# Altium PCB PreTriggerECAL_v3.PcbDoc (part 3 of 3)
Units mm, origin at the board's own origin, x right, y up, seen from the top; angles counter-clockwise.
Board outline 200 x 130 mm, 8 copper layers (Top Layer, Internal Plane 1, Mid-Layer 1, Mid-Layer 2, Mid-Layer 3, Mid-Layer 4, Mid-Layer 5, Bottom Layer), stack 1.695 mm thick; 121 components, 209 nets, 2107 pads, 421 vias.
Unrouted connection lines stored in the file: 26.
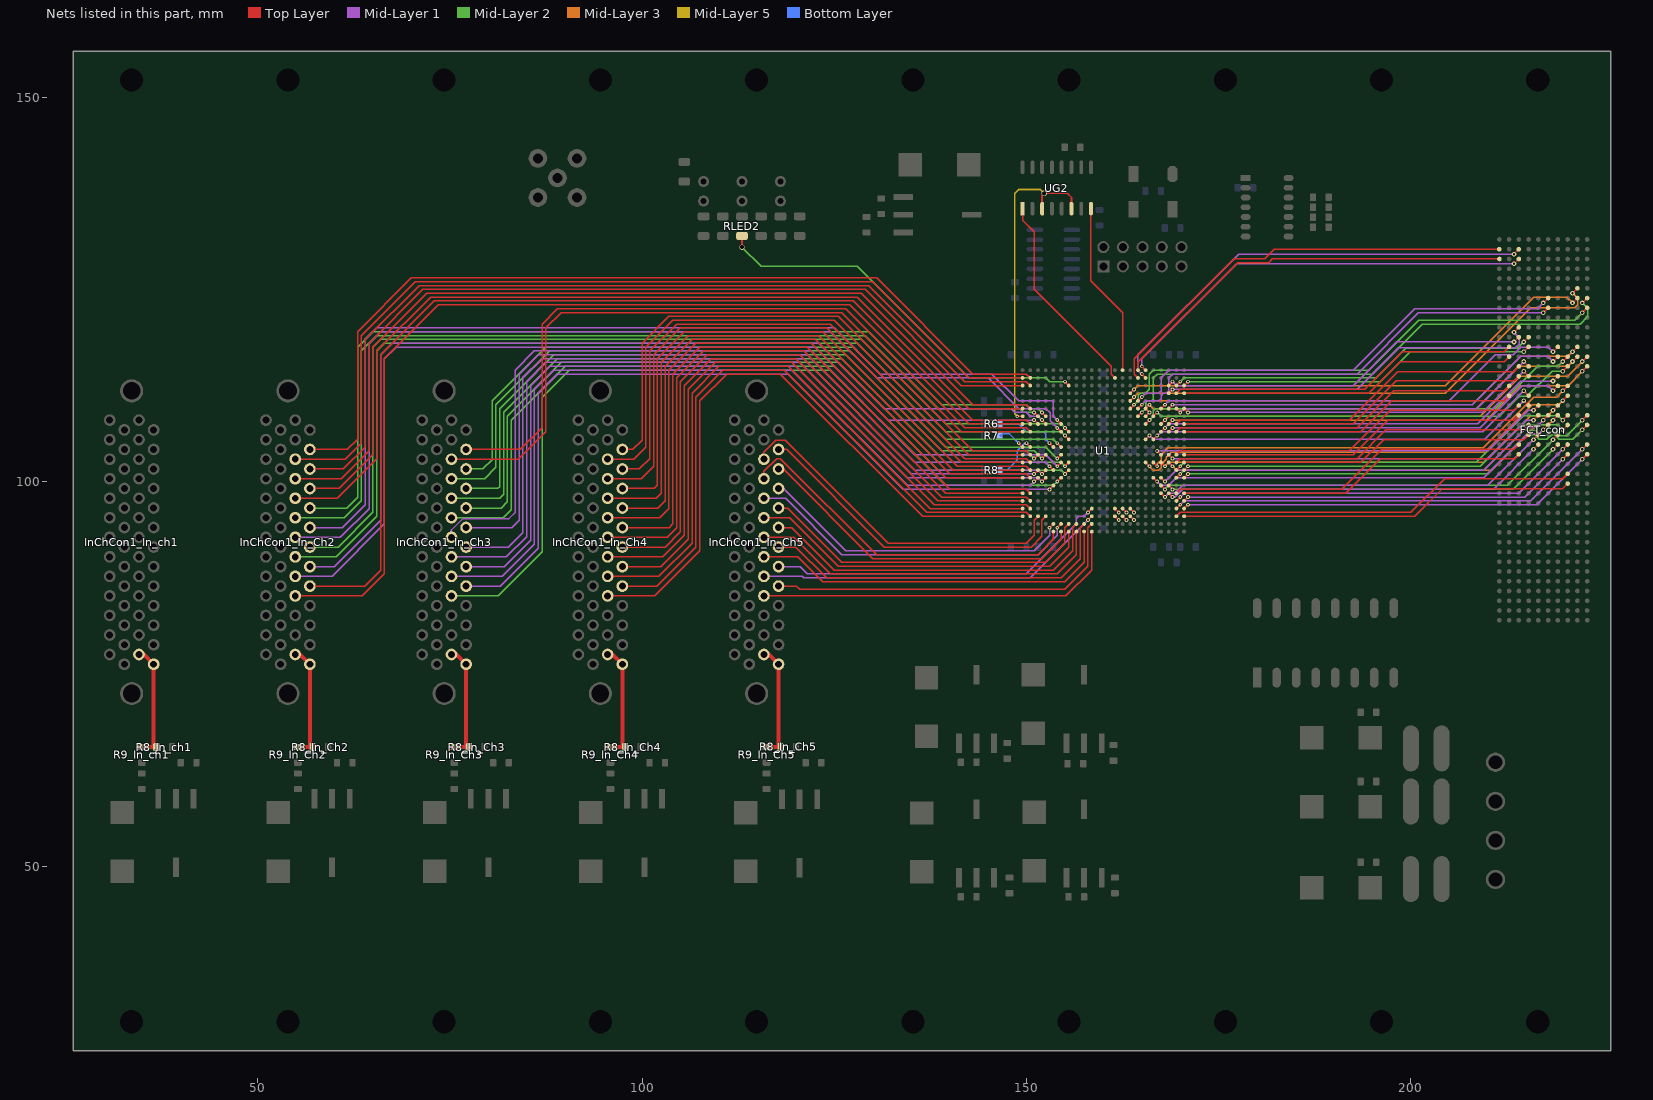
[diagram p9: the nets of this part, all layers, seen from the top]

## Via types
v1: diameter 0.5, hole 0.25, Top Layer to Bottom Layer, tented top, 267 vias
v2: diameter 0.6, hole 0.3, Top Layer to Bottom Layer, 60 vias
v3: diameter 1.3, hole 0.7, Top Layer to Bottom Layer, 50 vias
v4: diameter 0.7, hole 0.5, Top Layer to Bottom Layer, tented top, 30 vias
v5: diameter 0.5, hole 0.3, Top Layer to Bottom Layer, 4 vias
v6: diameter 2, hole 1.27, Top Layer to Bottom Layer, 2 vias
v7: diameter 0.7, hole 0.5, Top Layer to Bottom Layer, 2 vias
v8: diameter 0.7, hole 0.4, Top Layer to Bottom Layer, 2 vias
v9: diameter 1.27, hole 0.711, Top Layer to Bottom Layer, 2 vias
v10: diameter 3, hole 3, Top Layer to Bottom Layer, tented top, 2 vias

## Nets (pads, with @x,y where several pads share a name; then routed paths per layer and width w, separated by ;. In a path a pad name is that pad's centre, name@x,y a point inside that pad or via, vN(x,y) a via of type N, cw(c..) or ccw(c..) an arc to the next point about the centre after c; other vN are vias at no path point) (continued)
PART2_DIGCH1_N: InChCon1_In_Ch2.A5 U1.B1 | length 117.5
  Top Layer w0.175: InChCon1_In_Ch2.A5@54.892,102.92 61.42,102.92 63.5,105 63.5,119 70.5,126 130,126 142.5,113.5 U1.B1@149.5,113.5
PART2_DIGCH1_P: InChCon1_In_Ch2.A4 U1.B2 | length 116.5
  Top Layer w0.175: InChCon1_In_Ch2.A4@56.797,104.19 61.69,104.19 63,105.5 63,119.5 70,126.5 130.5,126.5 143,114 150,114 U1.B2@150.5,113.5
PART2_DIGCH2_N: InChCon1_In_Ch2.A7 U1.C1 | length 118.2
  Top Layer w0.175: InChCon1_In_Ch2.A7@54.892,100.38 60.88,100.38 64.5,104 64.5,118 71.5,125 129,125 141.5,112.5 U1.C1@149.5,112.5
PART2_DIGCH2_P: InChCon1_In_Ch2.A6 U1.C2 | length 117.2
  Top Layer w0.175: InChCon1_In_Ch2.A6@56.797,101.65 61.15,101.65 64,104.5 64,118.5 71,125.5 129.5,125.5 142,113 150,113 U1.C2@150.5,112.5
PART2_DIGCH3_N: InChCon1_In_Ch2.A9 U1.F1 | length 119.7
  Top Layer w0.175: InChCon1_In_Ch2.A9@54.892,97.84 60.34,97.84 65.5,103 65.5,117 72.5,124 128,124 142.5,109.5 U1.F1@149.5,109.5
PART2_DIGCH3_P: InChCon1_In_Ch2.A8 U1.F2 | length 118.6
  Top Layer w0.175: InChCon1_In_Ch2.A8@56.797,99.11 60.61,99.11 65,103.5 65,117.5 72,124.5 128.5,124.5 143,110 150,110 U1.F2@150.5,109.5
PART2_DIGCH4_N: InChCon1_In_Ch2.A11 U1.G3 | length 122.2
  Top Layer w0.175: v1(151,109) U1.G3@151.5,108.5
  Mid-Layer 2 w0.175: InChCon1_In_Ch2.A11@54.892,95.3 61.3,95.3 63.5,97.5 63.5,117 65.5,119 129,119 138.5,109.5 149.1,109.5 149.6,109 v1(151,109)
PART2_DIGCH4_P: InChCon1_In_Ch2.A10 U1.G4 | length 121.2
  Top Layer w0.175: v1(152,109) U1.G4@152.5,108.5
  Mid-Layer 2 w0.175: InChCon1_In_Ch2.A10@56.797,96.57 61.57,96.57 63,98 63,117.5 65,119.5 129.5,119.5 139,110 150,110 150.5,109.5 151.5,109.5 v1(152,109)
PART2_DIGCH5_N: InChCon1_In_Ch2.A13 U1.J6 | length 129.2
  Top Layer w0.175: v1(154,107) U1.J6@154.5,106.5
  Mid-Layer 1 w0.175: InChCon1_In_Ch2.A13@54.892,92.76 60.76,92.76 64.5,96.5 64.5,118 66,119.5 124.5,119.5 130.5,113.5 145,113.5 149,109.5 152.5,109.5 153.071,108.929 153.071,107.929 v1(154,107)
PART2_DIGCH5_P: InChCon1_In_Ch2.A12 U1.H6 | length 127.4
  Top Layer w0.175: v1(154,108) U1.H6@154.5,107.5
  Mid-Layer 1 w0.175: InChCon1_In_Ch2.A12@56.797,94.03 61.03,94.03 64,97 64,118.5 65.5,120 125,120 131,114 145.5,114 149,110.5 153.5,110.5 153.5,108.5 v1(154,108)
PART2_DIGCH6_N: InChCon1_In_Ch2.A15 U1.K7 | length 129.9
  Top Layer w0.175: v1(155,106) U1.K7@155.5,105.5
  Mid-Layer 2 w0.175: InChCon1_In_Ch2.A15@54.892,90.22 60.22,90.22 65.5,95.5 65.5,117 66.5,118 128,118 139.5,106.5 154.5,106.5 v1(155,106)
PART2_DIGCH6_P: InChCon1_In_Ch2.A14 U1.J7 | length 127.5
  Top Layer w0.175: v1(155,107) U1.J7@155.5,106.5
  Mid-Layer 2 w0.175: InChCon1_In_Ch2.A14@56.797,91.49 60.49,91.49 65,96 65,117.5 66,118.5 128.5,118.5 139.5,107.5 154.5,107.5 v1(155,107)
PART2_DIGCH7_N: InChCon1_In_Ch2.A17 U1.H3 | length 125.7
  Top Layer w0.175: v1(151,108) U1.H3@151.5,107.5
  Mid-Layer 1 w0.175: InChCon1_In_Ch2.A17@54.852,87.68 InChCon1_In_Ch2.A17@54.892,87.68 59.68,87.68 66.5,94.5 66.5,116 68,117.5 122.5,117.5 132,108 v1(151,108)
PART2_DIGCH7_P: InChCon1_In_Ch2.A16 U1.H4 | length 124.7
  Top Layer w0.175: v1(152,108) U1.H4@152.5,107.5
  Mid-Layer 1 w0.175: InChCon1_In_Ch2.A16@56.797,88.95 59.95,88.95 66,95 66,116.5 67.5,118 123,118 131.5,109.5 148,109.5 148.5,109 150,109 150.5,108.5 151.5,108.5 v1(152,108)
PART2_DIGCH8_N: InChCon1_In_Ch2.A19 U1.H1 | length 133.1
  Top Layer w0.175: InChCon1_In_Ch2.A19@54.892,85.14 63.64,85.14 66.5,88 66.5,116 73.5,123 127,123 142.5,107.5 U1.H1@149.5,107.5
PART2_DIGCH8_P: InChCon1_In_Ch2.A18 U1.H2 | length 132.1
  Top Layer w0.175: InChCon1_In_Ch2.A18@56.797,86.41 63.91,86.41 66,88.5 66,116.5 73,123.5 127.5,123.5 143,108 150,108 U1.H2@150.5,107.5
PART3_DIGCH1_N: InChCon1_In_Ch3.A5 U1.J1 | length 96.5
  Top Layer w0.175: InChCon1_In_Ch3.A5@75.212,102.92 83.92,102.92 87.5,106.5 87.5,120 89.5,122 126,122 141.5,106.5 U1.J1@149.5,106.5
PART3_DIGCH1_P: InChCon1_In_Ch3.A4 U1.J2 | length 95.5
  Top Layer w0.175: InChCon1_In_Ch3.A4@77.117,104.19 84.19,104.19 87,107 87,120.5 89,122.5 126.5,122.5 142,107 150,107 U1.J2@150.5,106.5
PART3_DIGCH2_N: InChCon1_In_Ch3.A7 U1.M6 | length 96.9
  Top Layer w0.175: v1(154,103) U1.M6@154.5,103.5
  Mid-Layer 2 w0.175: InChCon1_In_Ch3.A7@75.212,100.38 79.52,100.38 81,101.86 81,110 88,117 127,117 139.5,104.5 152.5,104.5 v1(154,103)
PART3_DIGCH2_P: InChCon1_In_Ch3.A6 U1.L6 | length 93.8
  Top Layer w0.175: v1(154,105) U1.L6@154.5,104.5
  Mid-Layer 2 w0.175: InChCon1_In_Ch3.A6@77.117,101.65 79.29,101.65 80.5,102.86 80.5,110.5 87.5,117.5 127.5,117.5 139.5,105.5 153.5,105.5 v1(154,105)
PART3_DIGCH3_N: InChCon1_In_Ch3.A9 U1.M3 | length 95.6
  Top Layer w0.175: v1(151,103) U1.M3@151.5,103.5
  Mid-Layer 2 w0.175: InChCon1_In_Ch3.A9@75.212,97.84 81.48,97.84 82,98.36 82,109 89,116 126,116 138.5,103.5 150.5,103.5 v1(151,103)
PART3_DIGCH3_P: InChCon1_In_Ch3.A8 U1.M4 | length 94.3
  Top Layer w0.175: v1(152,103) U1.M4@152.5,103.5
  Mid-Layer 2 w0.175: InChCon1_In_Ch3.A8@77.117,99.11 81.25,99.11 81.5,99.36 81.5,109.5 88.5,116.5 126.5,116.5 139,104 151,104 v1(152,103)
PART3_DIGCH4_N: InChCon1_In_Ch3.A11 U1.P7 | length 101.3
  Top Layer w0.175: v1(155,101) U1.P7@155.5,101.5
  Mid-Layer 2 w0.175: InChCon1_In_Ch3.A11@75.212,95.3 81.94,95.3 83,96.36 83,108 90,115 125,115 138.5,101.5 154.5,101.5 v1(155,101)
PART3_DIGCH4_P: InChCon1_In_Ch3.A10 U1.N7 | length 98.5
  Top Layer w0.175: v1(155,102) U1.N7@155.5,102.5
  Mid-Layer 2 w0.175: InChCon1_In_Ch3.A10@77.117,96.57 81.71,96.57 82.5,97.36 82.5,108.5 89.5,115.5 125.5,115.5 138.5,102.5 154.5,102.5 v1(155,102)
PART3_DIGCH5_N: InChCon1_In_Ch3.A13 U1.N6 | length 107.1
  Top Layer w0.175: v1(154,102) U1.N6@154.5,102.5
  Mid-Layer 1 w0.175: 83.5,96 83.5,114.5 86,117 122,117 135.5,103.5 152.5,103.5 v1(154,102)
  Mid-Layer 1 w0.2: InChCon1_In_Ch3.A13@75.212,92.76 75.212,93.712 76.7,95.2 82.7,95.2 83.5,96
PART3_DIGCH5_P: InChCon1_In_Ch3.A12 U1.P5 | length 103
  Top Layer w0.175: v1(153,102) U1.P5@153.5,101.5
  Mid-Layer 1 w0.175: InChCon1_In_Ch3.A12@77.117,94.03 83.03,94.03 84,95 84,114 86.5,116.5 121.5,116.5 135.5,102.5 152.5,102.5 v1(153,102)
PART3_DIGCH6_N: InChCon1_In_Ch3.A15 U1.P3 | length 104.8
  Top Layer w0.175: v1(151,101) U1.P3@151.5,101.5
  Mid-Layer 1 w0.175: InChCon1_In_Ch3.A15@75.212,90.22 82.36,90.22 85,92.86 85,113 87.5,115.5 120.5,115.5 135,101 v1(151,101)
PART3_DIGCH6_P: InChCon1_In_Ch3.A14 U1.P4 | length 103.8
  Top Layer w0.175: v1(152,101) U1.P4@152.5,101.5
  Mid-Layer 1 w0.175: InChCon1_In_Ch3.A14@77.117,91.49 82.63,91.49 84.5,93.36 84.5,113.5 87,116 121,116 135.5,101.5 151.5,101.5 v1(152,101)
PART3_DIGCH7_N: InChCon1_In_Ch3.A17 U1.R3 | length 105.9
  Top Layer w0.175: v1(151,100) U1.R3@151.5,100.5
  Mid-Layer 1 w0.175: InChCon1_In_Ch3.A17@75.172,87.68 InChCon1_In_Ch3.A17@75.212,87.68 81.82,87.68 86,91.86 86,112 88.5,114.5 119.5,114.5 134.5,99.5 150.5,99.5 v1(151,100)
PART3_DIGCH7_P: InChCon1_In_Ch3.A16 U1.R4 | length 104.4
  Top Layer w0.175: v1(152,100) U1.R4@152.5,100.5
  Mid-Layer 1 w0.175: InChCon1_In_Ch3.A16@77.117,88.95 82.09,88.95 85.5,92.36 85.5,112.5 88,115 120,115 134.5,100.5 151.5,100.5 v1(152,100)
PART3_DIGCH8_N: InChCon1_In_Ch3.A19 U1.R6 | length 109.9
  Top Layer w0.175: v1(154,100) U1.R6@154.5,100.5
  Mid-Layer 2 w0.175: InChCon1_In_Ch3.A19@75.212,85.14 81.28,85.14 87,90.86 87,111 90.5,114.5 124.5,114.5 139.5,99.5 153.5,99.5 v1(154,100)
PART3_DIGCH8_P: InChCon1_In_Ch3.A18 U1.T5 | length 106
  Top Layer w0.175: v1(153,99) U1.T5@153.5,99.5
  Mid-Layer 1 w0.175: InChCon1_In_Ch3.A18@77.117,86.41 81.55,86.41 86.5,91.36 86.5,111.5 89,114 119,114 134,99 v1(153,99)
PART4_DIGCH1_N: InChCon1_In_Ch4.A5 U1.M1 | length 76.3
  Top Layer w0.175: InChCon1_In_Ch4.A5@95.532,102.92 98.92,102.92 100.5,104.5 100.5,117.5 104,121 125,121 142.5,103.5 U1.M1@149.5,103.5
PART4_DIGCH1_P: InChCon1_In_Ch4.A4 U1.M2 | length 75.1
  Top Layer w0.175: InChCon1_In_Ch4.A4@97.437,104.19 98.79,104.19 100,105.4 100,118 103.5,121.5 125.5,121.5 143,104 150,104 U1.M2@150.5,103.5
PART4_DIGCH2_N: InChCon1_In_Ch4.A7 U1.N1 | length 77.8
  Top Layer w0.175: InChCon1_In_Ch4.A7@95.532,100.38 99.88,100.38 101.5,102 101.5,116.5 105,120 124,120 141.5,102.5 U1.N1@149.5,102.5
PART4_DIGCH2_P: InChCon1_In_Ch4.A6 U1.N2 | length 76.5
  Top Layer w0.175: InChCon1_In_Ch4.A6@97.437,101.65 99.65,101.65 101,103 101,117 104.5,120.5 124.5,120.5 142,103 150,103 U1.N2@150.5,102.5
PART4_DIGCH3_N: InChCon1_In_Ch4.A9 U1.P1 | length 79.9
  Top Layer w0.175: InChCon1_In_Ch4.A9@95.532,97.84 101.84,97.84 102.5,98.5 102.5,115.5 106,119 123,119 140.5,101.5 U1.P1@149.5,101.5
PART4_DIGCH3_P: InChCon1_In_Ch4.A8 U1.P2 | length 78.6
  Top Layer w0.175: InChCon1_In_Ch4.A8@97.437,99.11 101.61,99.11 102,99.5 102,116 105.5,119.5 123.5,119.5 141,102 150,102 U1.P2@150.5,101.5
PART4_DIGCH4_N: InChCon1_In_Ch4.A11 U1.R1 | length 81.2
  Top Layer w0.175: InChCon1_In_Ch4.A11@95.532,95.3 102.3,95.3 103.5,96.5 103.5,114.5 107,118 122,118 139.5,100.5 U1.R1@149.5,100.5
PART4_DIGCH4_P: InChCon1_In_Ch4.A10 U1.R2 | length 79.9
  Top Layer w0.175: InChCon1_In_Ch4.A10@97.437,96.57 102.07,96.57 103,97.5 103,115 106.5,118.5 122.5,118.5 140,101 150,101 U1.R2@150.5,100.5
PART4_DIGCH5_N: InChCon1_In_Ch4.A13 U1.U1 | length 83.1
  Top Layer w0.175: InChCon1_In_Ch4.A13@95.532,92.76 103.26,92.76 104.5,94 104.5,113.5 108,117 121,117 139.5,98.5 U1.U1@149.5,98.5
PART4_DIGCH5_P: InChCon1_In_Ch4.A12 U1.U2 | length 82.1
  Top Layer w0.175: InChCon1_In_Ch4.A12@97.437,94.03 103.53,94.03 104,94.5 104,114 107.5,117.5 121.5,117.5 140,99 150,99 U1.U2@150.5,98.5
PART4_DIGCH6_N: InChCon1_In_Ch4.A15 U1.V1 | length 83.7
  Top Layer w0.175: InChCon1_In_Ch4.A15@95.532,90.22 102.72,90.22 105.5,93 105.5,112.5 109,116 119.993,116 138.493,97.5 U1.V1@149.5,97.5
PART4_DIGCH6_P: InChCon1_In_Ch4.A14 U1.V2 | length 82.7
  Top Layer w0.175: InChCon1_In_Ch4.A14@97.437,91.49 102.99,91.49 105,93.5 105,113 108.5,116.5 120.5,116.5 139,98 150,98 U1.V2@150.5,97.5
PART4_DIGCH7_N: InChCon1_In_Ch4.A17 U1.W1 | length 84.4
  Top Layer w0.175: InChCon1_In_Ch4.A17@95.532,87.68 102.18,87.68 106.5,92 106.5,111.5 110,115 119,115 137.5,96.5 U1.W1@149.5,96.5
PART4_DIGCH7_P: InChCon1_In_Ch4.A16 U1.W2 | length 83.4
  Top Layer w0.175: InChCon1_In_Ch4.A16@97.437,88.95 102.45,88.95 106,92.5 106,112 109.5,115.5 119.5,115.5 138,97 150,97 U1.W2@150.5,96.5
PART4_DIGCH8_N: InChCon1_In_Ch4.A19 U1.Y1 | length 85
  Top Layer w0.175: InChCon1_In_Ch4.A19@95.532,85.14 101.64,85.14 107.5,91 107.5,110.5 111,114 118,114 136.5,95.5 U1.Y1@149.5,95.5
PART4_DIGCH8_P: InChCon1_In_Ch4.A18 U1.Y2 | length 84
  Top Layer w0.175: InChCon1_In_Ch4.A18@97.437,86.41 101.91,86.41 107,91.5 107,111 110.5,114.5 118.5,114.5 137,96 150,96 U1.Y2@150.5,95.5
PART5_DIGCH1_N: InChCon1_In_Ch5.A5 U1.Y3 | length 45.4
  Top Layer w0.175: InChCon1_In_Ch5.A5@115.852,102.92 115.852,103.852 117.4,105.4 118.6,105.4 132,92 150,92 151,93 151,95 U1.Y3@151.5,95.5
PART5_DIGCH1_P: InChCon1_In_Ch5.A4 U1.Y4 | length 42.9
  Top Layer w0.175: InChCon1_In_Ch5.A4@117.757,104.19 118.81,104.19 131.5,91.5 150.6,91.5 152,92.9 152,95 U1.Y4@152.5,95.5
PART5_DIGCH2_N: InChCon1_In_Ch5.A7 U1.AB5 | length 46.3
  Top Layer w0.175: InChCon1_In_Ch5.A7@115.852,100.38 115.852,101.352 117.5,103 118,103 130.5,90.5 151.5,90.5 153.5,92.5 U1.AB5@153.5,93.5
PART5_DIGCH2_P: InChCon1_In_Ch5.A6 U1.AB6 | length 43.6
  Top Layer w0.175: InChCon1_In_Ch5.A6@117.757,101.65 118.35,101.65 130,90 152,90 154.5,92.5 U1.AB6@154.5,93.5
PART5_DIGCH3_N: InChCon1_In_Ch5.A9 U1.AA6 | length 43.9
  Top Layer w0.175: v1(154,94) U1.AA6@154.5,94.5
  Mid-Layer 1 w0.175: InChCon1_In_Ch5.A9@115.852,97.84 118.66,97.84 126,90.5 151.5,90.5 154,93 v1(154,94)
PART5_DIGCH3_P: InChCon1_In_Ch5.A8 U1.AA5 | length 41.1
  Top Layer w0.175: v1(153,94) U1.AA5@153.5,94.5
  Mid-Layer 1 w0.175: InChCon1_In_Ch5.A8@117.757,99.11 118.39,99.11 126.5,91 151,91 153,93 v1(153,94)
PART5_DIGCH4_N: InChCon1_In_Ch5.A11 U1.AB7 | length 45.3
  Top Layer w0.175: InChCon1_In_Ch5.A11@115.852,95.3 119.2,95.3 125.5,89 153,89 155.5,91.5 U1.AB7@155.5,93.5
PART5_DIGCH4_P: InChCon1_In_Ch5.A10 U1.AA7 | length 43.9
  Top Layer w0.175: InChCon1_In_Ch5.A10@117.757,96.57 118.93,96.57 126,89.5 152.5,89.5 155,92 155,94 U1.AA7@155.5,94.5
PART5_DIGCH5_N: InChCon1_In_Ch5.A13 U1.AB8 | length 46.7
  Top Layer w0.175: InChCon1_In_Ch5.A13@115.852,92.76 119.74,92.76 124.5,88 154,88 156.5,90.5 U1.AB8@156.5,93.5
PART5_DIGCH5_P: InChCon1_In_Ch5.A12 U1.AA8 | length 45.3
  Top Layer w0.175: InChCon1_In_Ch5.A12@117.757,94.03 119.47,94.03 125,88.5 153.5,88.5 156,91 156,94 U1.AA8@156.5,94.5
PART5_DIGCH6_N: InChCon1_In_Ch5.A15 U1.AB9 | length 48
  Top Layer w0.175: InChCon1_In_Ch5.A15@115.852,90.22 120.28,90.22 123.5,87 155,87 157.5,89.5 U1.AB9@157.5,93.5
PART5_DIGCH6_P: InChCon1_In_Ch5.A14 U1.AA9 | length 46.6
  Top Layer w0.175: InChCon1_In_Ch5.A14@117.757,91.49 120.01,91.49 124,87.5 154.5,87.5 157,90 157,94 U1.AA9@157.5,94.5
PART5_DIGCH7_N: InChCon1_In_Ch5.A17 U1.Y10 | length 46
  Top Layer w0.175: v1(158,95) U1.Y10@158.5,95.5
  Mid-Layer 1 w0.175: InChCon1_In_Ch5.A17@115.852,87.68 120.82,87.68 121,87.5 150.5,87.5 v1(158,95)
PART5_DIGCH7_P: InChCon1_In_Ch5.A16 U1.W10 | length 45.1
  Top Layer w0.175: v1(158,96) U1.W10@158.5,96.5
  Mid-Layer 1 w0.175: InChCon1_In_Ch5.A16@117.757,88.95 120.55,88.95 121.5,88 150,88 156.5,94.5 156.5,95.2 156.8,95.5 157.5,95.5 v1(158,96)
PART5_DIGCH8_N: InChCon1_In_Ch5.A19 U1.AB10 | length 49
  Top Layer w0.175: InChCon1_In_Ch5.A19@115.852,85.14 155.14,85.14 158.5,88.5 U1.AB10@158.5,93.5
PART5_DIGCH8_P: InChCon1_In_Ch5.A18 U1.AA10 | length 47.4
  Top Layer w0.175: 155,86 158,89 158,94 U1.AA10@158.5,94.5
  Top Layer w0.2: InChCon1_In_Ch5.A18@117.757,86.41 120.09,86.41 120.5,86 155,86
PLL_CLK: U1.G1 UG2.3 UG2.6 | length 41.4
  Top Layer w0.175: v1(148.8,108.5) U1.G1@149.5,108.5
  Top Layer w0.2: 152.04,137.24 v7(152.3,137.5) 155.3,137.5 155.85,136.95
  Top Layer w0.254: UG2.3@152.04,135.5 152.04,137.24 ; UG2.6@155.85,135.5 155.85,136.95
  Mid-Layer 5 w0.2: v1(148.8,108.5) 148.473,108.827 148.473,137.473 149,138 151.8,138 v7(152.3,137.5)
"PRE BEAM TIME_N": FCT_con.B13 U1.D22 | length 44.2
  Top Layer w0.175: U1.D22@170.5,111.5 172,111.5 194.5,111.5 198.6,115.6 212.11,115.6 FCT_con.B13@212.77,116.26
"PRE BEAM TIME_P": FCT_con.B12 U1.D21 | length 45.8
  Top Layer w0.175: U1.D21@169.5,111.5 170,112 194,112 198.9,116.9 212.14,116.9 FCT_con.B12@212.77,117.53
"SIGNAL WINDOW_N": FCT_con.B17 U1.J22 | length 44.2
  Top Layer w0.175: U1.J22@170.5,106.5 193.5,106.5 197.5,110.5 212.09,110.5 FCT_con.B17@212.77,111.18
"SIGNAL WINDOW_P": FCT_con.B16 U1.J21 | length 45.7
  Top Layer w0.175: U1.J21@169.5,106.5 170,107 193,107 197.8,111.8 212.12,111.8 FCT_con.B16@212.77,112.45
"STATUS IN 1_N": FCT_con.A3 U1.A16 | length 53.6
  Top Layer w0.175: U1.A16@164.5,114.5 164.5,115.5 177.5,128.5 181.5,128.5 181.96,128.96 FCT_con.A3@211.5,128.96
"STATUS IN 1_P": FCT_con.A2 U1.B16 | length 56.1
  Top Layer w0.175: U1.B16@164.5,113.5 164,114 164,116 177,129 181,129 182.23,130.23 FCT_con.A2@211.5,130.23
"STATUS IN 2_N": FCT_con.K8 U1.F15 | length 66.4
  Top Layer w0.175: U1.F15@163.5,109.5 v1(164,110)
  Top Layer w0.2: v2(222.295,121.975) FCT_con.K8@222.93,122.61
  Mid-Layer 2 w0.175: v1(164,110) 164.512,110.512 164.512,111.212 164.8,111.5 165.5,111.5 166,112 166,114 166.5,114.5 194.5,114.5 201,121 221.32,121 v2(222.295,121.975)
"STATUS IN 2_P": FCT_con.K7 U1.G16 | length 68.9
  Top Layer w0.175: U1.G16@164.5,108.5 v1(165,109)
  Top Layer w0.2: v2(222.295,123.245) FCT_con.K7@222.93,123.88
  Mid-Layer 2 w0.175: v1(165,109) 165.5,109.5 165.5,110.3 165.7,110.5 166.3,110.5 166.5,110.7 166.5,113.5 167,114 195,114 201.5,120.5 222,120.5 223,121.5 223,122.54 v2(222.295,123.245)
"STATUS IN 3_N": FCT_con.J7 U1.D15 | length 63.9
  Top Layer w0.175: U1.D15@163.5,111.5 v1(164,112)
  Top Layer w0.2: v2(221.025,123.245) FCT_con.J7@221.66,123.88
  Mid-Layer 3 w0.175: v1(164,112) 164.5,112.5 204.5,112.5 216,124 220.27,124 v2(221.025,123.245)
"STATUS IN 3_P": FCT_con.J6 U1.E15 | length 66.1
  Top Layer w0.175: U1.E15@163.5,110.5 v1(164,111)
  Top Layer w0.2: v2(221.025,124.515) FCT_con.J6@221.66,125.15
  Mid-Layer 3 w0.175: v1(164,111) 164.5,111.5 204.5,111.5 215.604,122.604 221.304,122.604 221.7,123 221.7,123.84 v2(221.025,124.515)
"STATUS IN 4_N": FCT_con.F8 U1.F16 | length 60
  Top Layer w0.175: U1.F16@164.5,109.5 v1(165,110)
  Top Layer w0.2: v2(217.215,121.975) FCT_con.F8@217.85,122.61
  Mid-Layer 1 w0.175: v1(165,110) 165.5,110.5 167.2,110.5 167.5,110.8 167.5,111.2 167.8,111.5 168.2,111.5 168.5,111.8 168.5,113.5 169,114 193,114 200.975,121.975 v2(217.215,121.975)
"STATUS IN 4_P": FCT_con.F7 U1.E16 | length 59.9
  Top Layer w0.175: U1.E16@164.5,110.5 v1(165,111)
  Top Layer w0.2: v2(217.215,123.245) FCT_con.F7@217.85,123.88
  Mid-Layer 1 w0.175: v1(165,111) 165.5,111.5 167.2,111.5 167.5,111.8 167.5,113.5 168.5,114.5 192.5,114.5 200.5,122.5 216.47,122.5 v2(217.215,123.245)
SW_FCT-CLK: U1.A14 UG2.8 | length 22.7
  Top Layer w0.175: UG2.8@158.39,135.5 158.39,126.11 162.5,122 162.5,117 U1.A14@162.5,114.5
SW_QUARTZ: U1.B13 UG2.1 | length 27
  Top Layer w0.175: 151,125 161,115 161,114 U1.B13@161.5,113.5
  Top Layer w0.2: UG2.1@149.5,135.5 149.5,134 151,132.5 151,125
TCK: R8.2 U1.L2 | length 6.1
  Top Layer w0.175: v1(150,105) U1.L2@150.5,104.5
  Bottom Layer w0.2: R8.2@146.754,101.5 147.5,101.5 148.8,102.8 148.8,104.011 149.789,105 v1(150,105)
TDI: R6.2 U1.L5 | length 8.7
  Top Layer w0.175: v1(153,105) U1.L5@153.5,104.5
  Bottom Layer w0.2: R6.2@146.5,107.5 R6.2@146.754,107.5 149,107.5 150,106.5 152.207,106.5 152.5,106.207 152.5,106.1 152.5,105.5 v1(153,105)
TEST0: U1.W13 | length 0.7
  Top Layer w0.175: U1.W13@161.5,96.5 v1(162,96)
TEST1: U1.W14 | length 0.7
  Top Layer w0.175: U1.W14@162.5,96.5 v1(163,96)
TEST2: U1.W15 | length 0.7
  Top Layer w0.175: U1.W15@163.5,96.5 v1(164,96)
TEST3: U1.Y13 | length 0.7
  Top Layer w0.175: U1.Y13@161.5,95.5 v1(162,95)
TEST4: U1.Y14 | length 0.7
  Top Layer w0.175: U1.Y14@162.5,95.5 v1(163,95)
TEST5: U1.Y15 | length 0.7
  Top Layer w0.175: U1.Y15@163.5,95.5 v1(164,95)
TMS: R7.2 U1.L1 | length 3.8
  Top Layer w0.175: v1(149,105) U1.L1@149.5,104.5
  Bottom Layer w0.2: R7.2@146.5,106 R7.2@146.754,106 146.954,106.2 147.8,106.2 v1(149,105)
TRIG_LIGHT: RLED2.2 U1.C7 | length 51.5
  Top Layer w0.175: v1(155,113) U1.C7@155.5,112.5
  Top Layer w0.3: v4(113,130.5) RLED2.2@113,131.706 RLED2.2@113,131.746
  Top Layer w0.5: RLED2.2@113,131.746 RLED2.2@113,131.96 RLED2.2@113,132
  Mid-Layer 2 w0.175: v4(113,130.5) 115.5,128 128,128 142.5,113.5 152.5,113.5 153,113 v1(155,113)
"TRIGGER DATA1_N": FCT_con.D21 U1.N22 | length 46.3
  Top Layer w0.175: U1.N22@170.5,102.5 193.5,102.5 196.46,105.46 214.67,105.46 FCT_con.D21@215.31,106.1
"TRIGGER DATA1_P": FCT_con.D20 U1.N21 | length 47.8
  Top Layer w0.175: U1.N21@169.5,102.5 170,103 193,103 196.76,106.76 214.7,106.76 FCT_con.D20@215.31,107.37
"TRIGGER DATA2_N": FCT_con.C23 U1.U22 | length 45.6
  Top Layer w0.175: U1.U22@170.5,98.5 191.5,98.5 196,103 213.48,103 FCT_con.C23@214.04,103.56
"TRIGGER DATA2_P": FCT_con.C22 U1.U21 | length 47.2
  Top Layer w0.175: U1.U21@169.5,98.5 170,99 191,99 196.2,104.2 213.41,104.2 FCT_con.C22@214.04,104.83
"TRIGGER DATA3_N": FCT_con.F20 U1.R18 | length 55
  Top Layer w0.175: U1.R18@166.5,100.5 v1(167,100)
  Top Layer w0.2: v2(217.215,106.735) FCT_con.F20@217.85,107.37
  Mid-Layer 1 w0.175: v1(167,100) 167.5,99.5 168.5,99.5 169.5,100.5 209.5,100.5 215.2,106.2 216.68,106.2 v2(217.215,106.735)
"TRIGGER DATA3_P": FCT_con.F19 U1.R19 | length 54.1
  Top Layer w0.175: U1.R19@167.5,100.5 v1(168,100)
  Top Layer w0.2: v2(217.215,108.005) FCT_con.F19@217.85,108.64
  Mid-Layer 1 w0.175: v1(168,100) 169.5,101.5 209.5,101.5 215,107 216.21,107 v2(217.215,108.005)
"TRIGGER DATA4_N": FCT_con.E19 U1.M20 | length 50.6
  Top Layer w0.175: U1.M20@168.5,103.5 v1(169,103)
  Top Layer w0.2: v2(215.945,108.005) FCT_con.E19@216.58,108.64
  Mid-Layer 1 w0.175: v1(169,103) 210,103 215.005,108.005 v2(215.945,108.005)
"TRIGGER DATA4_P": FCT_con.E18 U1.M19 | length 52.7
  Top Layer w0.175: v1(167,104) U1.M19@167.5,103.5
  Top Layer w0.2: v2(215.945,109.275) FCT_con.E18@216.58,109.91
  Mid-Layer 1 w0.175: v1(167,104) 210,104 215.275,109.275 v2(215.945,109.275)
"TRIGGER DATA5_N": FCT_con.K20 U1.R22 | length 56.3
  Top Layer w0.175: U1.R22@170.5,100.5 v1(171,101)
  Top Layer w0.2: v2(222.295,106.735) FCT_con.K20@222.93,107.37
  Mid-Layer 2 w0.175: v1(171,101) 210,101 215.1,106.1 216.1,106.1 216.7,105.5 217.7,105.5 218.3,106.1 218.7,106.1 219.3,105.5 221.06,105.5 v2(222.295,106.735)
"TRIGGER DATA5_P": FCT_con.K19 U1.R21 | length 57.8
  Top Layer w0.175: U1.R21@169.5,100.5 v1(170,101)
  Top Layer w0.2: v2(222.295,108.005) FCT_con.K19@222.93,108.64
  Mid-Layer 2 w0.175: v1(170,101) 170.5,101.5 209.5,101.5 214.7,106.7 216.2,106.7 216.9,106 217.5,106 218,106.5 219,106.5 219.5,106 220.295,106 v2@222.295,108
"TRIGGER DATA6_N": FCT_con.E22 U1.U20 | length 51.1
  Top Layer w0.175: U1.U20@168.5,98.5 v1(169,98)
  Top Layer w0.2: v2(215.945,104.195) FCT_con.E22@216.58,104.83
  Mid-Layer 1 w0.175: v1(169,98) 169.311,98 170.311,99 210.75,99 v2(215.945,104.195)
"TRIGGER DATA6_P": FCT_con.E21 U1.U19 | length 52.6
  Top Layer w0.175: U1.U19@167.5,98.5 v1(168,98)
  Top Layer w0.2: v2(215.945,105.465) FCT_con.E21@216.58,106.1
  Mid-Layer 1 w0.175: v1(168,98) 168.5,98.5 169.3,98.5 170.3,99.5 209.98,99.5 v2(215.945,105.465)
"TRIGGER DATA7_N": FCT_con.K23 U1.W22 | length 55.4
  Top Layer w0.175: U1.W22@170.5,96.5 v1(171,97)
  Top Layer w0.2: v2(222.295,102.925) FCT_con.K23@222.93,103.56
  Mid-Layer 1 w0.175: v1(171,97) 216.37,97 v2(222.295,102.925)
"TRIGGER DATA7_P": FCT_con.K22 U1.W21 | length 56.9
  Top Layer w0.175: U1.W21@169.5,96.5 v1(170,97)
  Top Layer w0.2: v2(222.295,104.195) FCT_con.K22@222.93,104.83
  Mid-Layer 1 w0.175: v1(170,97) 170.5,97.5 215.6,97.5 v2(222.295,104.195)
"TRIGGER DATA8_N": FCT_con.H23 U1.V22 | length 52.4
  Top Layer w0.175: U1.V22@170.5,97.5 v1(171,98)
  Top Layer w0.2: v2(219.755,102.925) FCT_con.H23@220.39,103.56
  Mid-Layer 1 w0.175: v1(171,98) 214.83,98 v2(219.755,102.925)
"TRIGGER DATA8_P": FCT_con.H22 U1.V21 | length 53.9
  Top Layer w0.175: U1.V21@169.5,97.5 v1(170,98)
  Top Layer w0.2: v2(219.755,104.195) FCT_con.H22@220.39,104.83
  Mid-Layer 1 w0.175: v1(170,98) 170.5,98.5 214.06,98.5 v2(219.755,104.195)
"TRIGGER DATA9_N": FCT_con.D12 U1.C22 | length 46.9
  Top Layer w0.175: U1.C22@170.5,112.5 v1(171,113)
  Top Layer w0.2: v2(214.675,116.895) FCT_con.D12@215.31,117.53
  Mid-Layer 2 w0.175: v1(171,113) 196,113 199.895,116.895 v2(214.675,116.895)
"TRIGGER DATA9_P": FCT_con.D11 U1.C21 | length 48.4
  Top Layer w0.175: U1.C21@169.5,112.5 v1(170,113)
  Top Layer w0.2: v2(214.675,118.165) FCT_con.D11@215.31,118.8
  Mid-Layer 2 w0.175: v1(170,113) 170.5,113.5 195.5,113.5 199.324,117.324 213.834,117.324 v2(214.675,118.165)
"TRIGGER DATA10_N": FCT_con.C11 U1.C20 | length 48.6
  Top Layer w0.175: U1.C20@168.5,112.5 v1(169,113)
  Top Layer w0.2: v2(213.405,118.165) FCT_con.C11@214.04,118.8
  Mid-Layer 1 w0.175: v1(169,113) 169.5,112.5 192.5,112.5 198.165,118.165 v2(213.405,118.165)
"TRIGGER DATA10_P": FCT_con.C10 U1.D20 | length 51
  Top Layer w0.175: U1.D20@168.5,111.5 v1(169,112)
  Top Layer w0.2: v2(213.405,119.435) FCT_con.C10@214.04,120.07
  Mid-Layer 1 w0.175: v1(169,112) 193,112 198.4,117.4 213.6,117.4 214.1,117.9 214.1,118.74 v2(213.405,119.435)
"TRIGGER DATA11_N": FCT_con.D15 U1.F22 | length 47.5
  Top Layer w0.175: U1.F22@170.5,109.5 v1(171,109)
  Top Layer w0.2: v2(214.675,114.355) FCT_con.D15@215.31,113.72
  Mid-Layer 1 w0.175: v1(171,109) 209.32,109 v2(214.675,114.355)
"TRIGGER DATA11_P": FCT_con.D14 U1.F21 | length 49
  Top Layer w0.175: U1.F21@169.5,109.5 v1(170,109)
  Top Layer w0.2: v2(214.675,115.625) FCT_con.D14@215.31,114.99
  Mid-Layer 1 w0.175: v1(170,109) 170.5,109.5 208.55,109.5 v2(214.675,115.625)
"TRIGGER DATA12_N": FCT_con.C15 U1.H22 | length 46.1
  Top Layer w0.175: U1.H22@170.5,107.5 192.5,107.5 198.1,113.1 213.42,113.1 FCT_con.C15@214.04,113.72
"TRIGGER DATA12_P": FCT_con.C14 U1.H21 | length 47.6
  Top Layer w0.175: U1.H21@169.5,107.5 170,108 192,108 198.3,114.3 213.35,114.3 FCT_con.C14@214.04,114.99
"TRIGGER DATA13_N": FCT_con.D18 U1.K17 | length 52.6
  Top Layer w0.175: U1.K17@165.5,105.5 v1(166,106)
  Top Layer w0.2: v2(214.675,110.545) FCT_con.D18@215.31,109.91
  Mid-Layer 1 w0.175: v1(166,106) 166.5,105.5 209.63,105.5 v2(214.675,110.545)
"TRIGGER DATA13_P": FCT_con.D17 U1.K18 | length 51.7
  Top Layer w0.175: U1.K18@166.5,105.5 v1(167,106)
  Top Layer w0.2: v2(214.675,111.815) FCT_con.D17@215.31,111.18
  Mid-Layer 1 w0.175: v1(167,106) 167.5,106.5 209.36,106.5 v2(214.675,111.815)
"TRIGGER DATA14_N": FCT_con.C19 U1.M22 | length 45.7
  Top Layer w0.175: U1.M22@170.5,103.5 192.5,103.5 197,108 213.4,108 FCT_con.C19@214.04,108.64
"TRIGGER DATA14_P": FCT_con.C18 U1.M21 | length 47.2
  Top Layer w0.175: U1.M21@169.5,103.5 170,104 192,104 197.3,109.3 213.43,109.3 FCT_con.C18@214.04,109.91
"TRIGGER DATA15_N": FCT_con.H20 U1.P22 | length 52.9
  Top Layer w0.175: U1.P22@170.5,101.5 v1(171,102)
  Top Layer w0.2: v2(219.755,106.735) FCT_con.H20@220.39,107.37
  Mid-Layer 2 w0.175: v1(171,102) 209,102 214.4,107.4 219.09,107.4 v2(219.755,106.735)
"TRIGGER DATA15_P": FCT_con.H19 U1.P21 | length 54.3
  Top Layer w0.175: U1.P21@169.5,101.5 v1(170,102)
  Top Layer w0.2: v2(219.755,108.005) FCT_con.H19@220.39,108.64
  Mid-Layer 2 w0.175: v1(170,102) 170.5,102.5 208.5,102.5 214.6,108.6 219.16,108.6 v2(219.755,108.005)
"TRIGGER DATA16_N": FCT_con.G19 U1.N20 | length 54
  Top Layer w0.175: U1.N20@168.5,102.5 v1(169,102)
  Top Layer w0.2: v2(218.485,108.005) FCT_con.G19@219.12,108.64
  Mid-Layer 3 w0.175: v1(169,102) 169.5,101.5 210.5,101.5 216.4,107.4 217.88,107.4 v2(218.485,108.005)
"TRIGGER DATA16_P": FCT_con.G18 U1.N19 | length 55.1
  Top Layer w0.175: U1.N19@167.5,102.5 v1(168,102)
  Top Layer w0.2: v2(218.485,109.275) FCT_con.G18@219.12,109.91
  Mid-Layer 3 w0.175: v1(168,102) 168.5,102.5 209.5,102.5 215.6,108.6 217.81,108.6 v2(218.485,109.275)
"TRIGGER DATA17_N": FCT_con.K14 U1.H20 | length 57.5
  Top Layer w0.175: U1.H20@168.5,107.5 v1(169,108)
  Top Layer w0.2: v2(222.295,114.355) FCT_con.K14@222.93,114.99
  Mid-Layer 3 w0.175: v1(169,108) 209.8,108 214.3,112.5 220.44,112.5 v2(222.295,114.355)
"TRIGGER DATA17_P": FCT_con.K13 U1.H19 | length 59.1
  Top Layer w0.175: U1.H19@167.5,107.5 v1(168,108)
  Top Layer w0.2: v2(222.295,115.625) FCT_con.K13@222.93,116.26
  Mid-Layer 3 w0.175: v1(168,108) 168.5,108.5 209,108.5 214.2,113.7 220.37,113.7 v2(222.295,115.625)
"TRIGGER DATA18_N": FCT_con.J13 U1.F17 | length 59.4
  Top Layer w0.175: U1.F17@165.5,109.5 v1(166,110)
  Top Layer w0.2: v2(221.025,115.625) FCT_con.J13@221.66,116.26
  Mid-Layer 3 w0.175: v1(166,110) 166.5,109.5 208.5,109.5 214,115 220.4,115 v2(221.025,115.625)
"TRIGGER DATA18_P": FCT_con.J12 U1.G17 | length 61.4
  Top Layer w0.175: U1.G17@165.5,108.5 v1(166,109)
  Top Layer w0.2: v2(221.025,116.895) FCT_con.J12@221.66,117.53
  Mid-Layer 3 w0.175: v1(166,109) 165.5,109.5 165.5,110.3 165.7,110.5 208.5,110.5 214.3,116.3 220.43,116.3 v2(221.025,116.895)
"TRIGGER DATA19_N": FCT_con.H14 U1.G18 | length 57
  Top Layer w0.175: U1.G18@166.5,108.5 v1(167,109)
  Top Layer w0.2: v2(219.755,114.355) FCT_con.H14@220.39,114.99
  Mid-Layer 2 w0.175: v1(167,109) 167.5,108.5 211.5,108.5 214.1,111.1 215.1,111.1 218.355,114.355 v2(219.755,114.355)
"TRIGGER DATA19_P": FCT_con.H13 U1.H17 | length 58.9
  Top Layer w0.175: U1.H17@165.5,107.5 v1(166,108)
  Top Layer w0.2: v2(219.755,115.625) FCT_con.H13@220.39,116.26
  Mid-Layer 2 w0.175: v1(166,108) 166.5,108.5 166.5,109.2 166.8,109.5 211,109.5 216.5,115 219.13,115 v2(219.755,115.625)
"TRIGGER DATA20_N": FCT_con.G13 U1.F20 | length 54
  Top Layer w0.175: U1.F20@168.5,109.5 v1(169,110)
  Top Layer w0.2: v2(218.485,115.625) FCT_con.G13@219.12,116.26
  Mid-Layer 1 w0.175: v1(169,110) 208,110 214.3,116.3 217.81,116.3 v2(218.485,115.625)
"TRIGGER DATA20_P": FCT_con.G12 U1.F19 | length 55.4
  Top Layer w0.175: U1.F19@167.5,109.5 v1(168,110)
  Top Layer w0.2: v2(218.485,116.895) FCT_con.G12@219.12,117.53
  Mid-Layer 1 w0.175: v1(168,110) 168.5,110.5 205,110.5 211,116.5 213.3,116.5 214.3,117.5 217.88,117.5 v2(218.485,116.895)
"TRIGGER DATA21_N": FCT_con.H17 U1.N17 | length 59.7
  Top Layer w0.175: U1.N17@165.5,102.5 v1(166,102)
  Top Layer w0.2: v2(219.755,110.545) FCT_con.H17@220.39,111.18
  Mid-Layer 3 w0.175: v1(166,102) 166.5,101.5 167.2,101.5 167.5,101.8 167.5,102.2 168.2,102.9 168.2,103.2 168.8,103.8 209.6,103.8 215.8,110 219.21,110 v2(219.755,110.545)
"TRIGGER DATA21_P": FCT_con.H16 U1.N18 | length 59
  Top Layer w0.175: U1.N18@166.5,102.5 v1(167,102)
  Top Layer w0.2: v2(219.755,111.815) FCT_con.H16@220.39,112.45
  Mid-Layer 3 w0.175: v1(167,102) 167,102.3 167.5,102.8 167.5,103.5 168.4,104.4 209.4,104.4 216,111 218.94,111 v2(219.755,111.815)
"TRIGGER DATA22_N": FCT_con.G16 U1.J20 | length 53.7
  Top Layer w0.175: U1.J20@168.5,106.5 v1(169,107)
  Top Layer w0.2: v2(218.485,111.815) FCT_con.G16@219.12,112.45
  Mid-Layer 1 w0.175: v1(169,107) 209,107 214.5,112.5 217.8,112.5 v2(218.485,111.815)
"TRIGGER DATA22_P": FCT_con.G15 U1.J19 | length 54.6
  Top Layer w0.175: U1.J19@167.5,106.5 v1(168,107)
  Top Layer w0.2: v2(218.485,113.085) FCT_con.G15@219.12,113.72
  Mid-Layer 1 w0.175: v1(168,107) 168.5,107.5 208.7,107.5 214.285,113.085 v2(218.485,113.085)
"TRIGGER DATA23_N": FCT_con.G22 U1.T20 | length 53.2
  Top Layer w0.175: U1.T20@168.5,99.5 v1(169,99)
  Top Layer w0.2: v2(218.485,104.195) FCT_con.G22@219.12,104.83
  Mid-Layer 2 w0.175: v1(169,99) 213.29,99 v2(218.485,104.195)
"TRIGGER DATA23_P": FCT_con.G21 U1.T19 | length 54.8
  Top Layer w0.175: U1.T19@167.5,99.5 v1(168,99)
  Top Layer w0.2: v2(218.485,105.465) FCT_con.G21@219.12,106.1
  Mid-Layer 2 w0.175: v1(168,99) 168.5,99.5 212.52,99.5 v2(218.485,105.465)
"TRIGGER DATA24_N": FCT_con.H26 U1.Y22 | length 51.7
  Top Layer w0.2: U1.Y22@170.5,95.5 200.5,95.5 204.1,99.1 219.74,99.1 FCT_con.H26@220.39,99.75
"TRIGGER DATA24_P": FCT_con.H25 U1.Y21 | length 53.2
  Top Layer w0.175: U1.Y21@169.5,95.5 170,96 200,96 204.4,100.4 219.77,100.4 FCT_con.H25@220.39,101.02
TRIGGER_N: FCT_con.C3 U1.A17 | length 56.1
  Top Layer w0.175: v1(165,115) U1.A17@165.5,114.5
  Top Layer w0.2: v2(213.405,128.325) FCT_con.C3@214.04,128.96
  Mid-Layer 1 w0.175: v1(165,115) 165,116 177.325,128.325 v2(213.405,128.325)
TRIGGER_P: FCT_con.C2 U1.B17 | length 58.6
  Top Layer w0.175: v1(165,114) U1.B17@165.5,113.5
  Top Layer w0.2: v2(213.405,129.595) FCT_con.C2@214.04,130.23
  Mid-Layer 1 w0.175: v1(165,114) 164.5,114.5 164.5,116.5 177.595,129.595 v2(213.405,129.595)
VOFFSET: InChCon1_In_ch1.A25 InChCon1_In_ch1.A26 InChCon1_In_Ch2.A25 InChCon1_In_Ch2.A26 InChCon1_In_Ch3.A25 InChCon1_In_Ch3.A26 InChCon1_In_Ch4.A25 InChCon1_In_Ch4.A26 InChCon1_In_Ch5.A25 InChCon1_In_Ch5.A26 R8_In_ch1.1 R8_In_Ch2.1 R8_In_Ch3.1 R8_In_Ch4.1 R8_In_Ch5.1 R9_In_ch1.2 R9_In_Ch2.2 R9_In_Ch3.2 R9_In_Ch4.2 R9_In_Ch5.2 | length 71.5
  Top Layer w0.508: InChCon1_In_ch1.A25@34.572,77.52 35.207,77.52 InChCon1_In_ch1.A26@36.477,76.25 R8_In_ch1.1@36.477,65.578 ; R9_In_ch1.2@35.281,65.479 R8_In_ch1.1@36.477,65.479 ; InChCon1_In_Ch2.A25@54.892,77.52 55.527,77.52 InChCon1_In_Ch2.A26@56.797,76.25 R8_In_Ch2.1@56.797,65.578 ; R9_In_Ch2.2@55.601,65.479 R8_In_Ch2.1@56.797,65.479 ; InChCon1_In_Ch3.A25@75.212,77.52 75.847,77.52 InChCon1_In_Ch3.A26@77.117,76.25 R8_In_Ch3.1@77.117,65.578 ; R9_In_Ch3.2@75.921,65.479 R8_In_Ch3.1@77.117,65.479 ; InChCon1_In_Ch4.A25@95.532,77.52 96.167,77.52 InChCon1_In_Ch4.A26@97.437,76.25 R8_In_Ch4.1@97.437,65.578 ; R9_In_Ch4.2@96.241,65.479 R8_In_Ch4.1@97.437,65.479 ; InChCon1_In_Ch5.A25@115.852,77.52 116.487,77.52 InChCon1_In_Ch5.A26@117.757,76.25 R8_In_Ch5.1@117.757,65.578 ; R9_In_Ch5.2@116.561,65.479 R8_In_Ch5.1@117.757,65.479
pads on no net: Calib.WIRE Designator3.1 Designator3.2 Designator3.3 Designator3.4 Designator3.5 Designator3.6 Designator3.7 Designator3.8 Designator3.9 Designator3.10 Designator3.11 Designator3.12 Designator3.13 Designator3.14 Designator3.15 Designator3.16 FCT_con.A18 FCT_con.A19 FCT_con.A22 FCT_con.A23 FCT_con.A26 FCT_con.A27 FCT_con.A30 FCT_con.A31 FCT_con.A34 FCT_con.A35 FCT_con.A38 FCT_con.A39 FCT_con.B1 FCT_con.B8 FCT_con.B9 FCT_con.B20 FCT_con.B21 FCT_con.B24 FCT_con.B25 FCT_con.B28 FCT_con.B29 FCT_con.B32 FCT_con.B33 FCT_con.B36 FCT_con.B37 FCT_con.C6 FCT_con.C7 FCT_con.C26 FCT_con.C27 FCT_con.C35 FCT_con.C37 FCT_con.D4 FCT_con.D5 FCT_con.D8 FCT_con.D9 FCT_con.D23 FCT_con.D24 FCT_con.D26 FCT_con.D27 FCT_con.D29 FCT_con.D30 FCT_con.D31 FCT_con.D33 FCT_con.E2 FCT_con.E3 FCT_con.E6 FCT_con.E7 FCT_con.E9 FCT_con.E10 FCT_con.E12 FCT_con.E13 FCT_con.E15 FCT_con.E16 FCT_con.E24 FCT_con.E25 FCT_con.E27 FCT_con.E28 FCT_con.E30 FCT_con.E31 FCT_con.E33 FCT_con.E34 FCT_con.E36 FCT_con.E37 FCT_con.F4 FCT_con.F5 FCT_con.F10 FCT_con.F11 FCT_con.F13 FCT_con.F14 FCT_con.F16 FCT_con.F17 FCT_con.F22 FCT_con.F23 FCT_con.F25 FCT_con.F26 FCT_con.F28 FCT_con.F29 FCT_con.F31 FCT_con.F32 FCT_con.F34 FCT_con.F35 FCT_con.F37 FCT_con.F38 FCT_con.G2 FCT_con.G3 FCT_con.G6 FCT_con.G7 FCT_con.G9 FCT_con.G10 FCT_con.G24 FCT_con.G25 FCT_con.G27 FCT_con.G28 FCT_con.G30 FCT_con.G31 FCT_con.G33 FCT_con.G34 FCT_con.G36 FCT_con.G37 FCT_con.H1 FCT_con.H2 FCT_con.H4 FCT_con.H5 FCT_con.H7 FCT_con.H8 FCT_con.H10 FCT_con.H11 FCT_con.H28 FCT_con.H29 FCT_con.H31 FCT_con.H32 FCT_con.H34 FCT_con.H35 FCT_con.H37 FCT_con.H38 FCT_con.J9 FCT_con.J10 FCT_con.J15 FCT_con.J16 FCT_con.J18 FCT_con.J19 FCT_con.J20 FCT_con.J21 FCT_con.J22 FCT_con.J24 FCT_con.J25 FCT_con.J27 FCT_con.J28 FCT_con.J30 FCT_con.J31 FCT_con.J33 FCT_con.J34 FCT_con.J36 FCT_con.J37 FCT_con.J39 FCT_con.K1 FCT_con.K4 FCT_con.K5 FCT_con.K10 FCT_con.K11 FCT_con.K16 FCT_con.K17 FCT_con.K25 FCT_con.K26 FCT_con.K28 FCT_con.K29 FCT_con.K31 FCT_con.K32 FCT_con.K34 FCT_con.K35 FCT_con.K37 FCT_con.K38 FCT_con.K40 InChCon1_In_ch1.27 InChCon1_In_ch1.28 InChCon1_In_ch1.B2 InChCon1_In_ch1.B5 InChCon1_In_ch1.B7 InChCon1_In_ch1.B9 InChCon1_In_ch1.B11 InChCon1_In_ch1.B13 InChCon1_In_ch1.B15 InChCon1_In_ch1.B17 InChCon1_In_ch1.B19 InChCon1_In_ch1.B20 InChCon1_In_ch1.B21 InChCon1_In_ch1.B22 InChCon1_In_ch1.B24 InChCon1_In_Ch2.27 InChCon1_In_Ch2.28 InChCon1_In_Ch2.B2 InChCon1_In_Ch2.B5 InChCon1_In_Ch2.B7 InChCon1_In_Ch2.B9 InChCon1_In_Ch2.B11 InChCon1_In_Ch2.B13 InChCon1_In_Ch2.B15 InChCon1_In_Ch2.B17 InChCon1_In_Ch2.B19 InChCon1_In_Ch2.B20 InChCon1_In_Ch2.B21 InChCon1_In_Ch2.B22 InChCon1_In_Ch2.B24 InChCon1_In_Ch3.27 InChCon1_In_Ch3.28 InChCon1_In_Ch3.B2 InChCon1_In_Ch3.B5 InChCon1_In_Ch3.B7 InChCon1_In_Ch3.B9 InChCon1_In_Ch3.B11 InChCon1_In_Ch3.B13 InChCon1_In_Ch3.B15 InChCon1_In_Ch3.B17 InChCon1_In_Ch3.B19 InChCon1_In_Ch3.B20 InChCon1_In_Ch3.B21 InChCon1_In_Ch3.B22 InChCon1_In_Ch3.B24 InChCon1_In_Ch4.27 InChCon1_In_Ch4.28 InChCon1_In_Ch4.B2 InChCon1_In_Ch4.B5 InChCon1_In_Ch4.B7 InChCon1_In_Ch4.B9 InChCon1_In_Ch4.B11 InChCon1_In_Ch4.B13 InChCon1_In_Ch4.B15 InChCon1_In_Ch4.B17 InChCon1_In_Ch4.B19 InChCon1_In_Ch4.B20 InChCon1_In_Ch4.B21 InChCon1_In_Ch4.B22 InChCon1_In_Ch4.B24 InChCon1_In_Ch5.27 InChCon1_In_Ch5.28 InChCon1_In_Ch5.B2 InChCon1_In_Ch5.B5 InChCon1_In_Ch5.B7 InChCon1_In_Ch5.B9 InChCon1_In_Ch5.B11 InChCon1_In_Ch5.B13 InChCon1_In_Ch5.B15 InChCon1_In_Ch5.B17 InChCon1_In_Ch5.B19 InChCon1_In_Ch5.B20 InChCon1_In_Ch5.B21 InChCon1_In_Ch5.B22 InChCon1_In_Ch5.B24 U1.A19 U1.A20 U1.AA1 U1.AA3 U1.AA4 U1.AA17 U1.AA18 U1.AA19 U1.AA20 U1.AB3 U1.AB4 U1.AB17 U1.AB18 U1.AB19 U1.AB20 U1.B5 U1.B14 U1.B19 U1.B20 U1.C6 U1.C10 U1.C13 U1.C15 U1.C17 U1.D2 U1.D6 U1.D7 U1.D10 U1.D13 U1.D17 U1.E1 U1.E3 U1.E4 U1.E5 U1.E6 U1.E7 U1.E9 U1.E10 U1.E11 U1.E12 U1.E13 U1.E14 U1.E21 U1.E22 U1.F7 U1.F8 U1.F9 U1.F10 U1.F11 U1.F13 U1.F14 U1.G5 U1.G7 U1.G8 U1.G10 U1.G11 U1.G13 U1.G14 U1.G15 U1.H5 U1.H7 U1.H16 U1.H18 U1.J3 U1.J4 U1.J5 U1.J17 U1.J18 U1.K19 U1.K21 U1.K22 U1.L4 U1.L21 U1.L22 U1.M5 U1.M16 U1.N5 U1.N16 U1.P17 U1.P20 U1.R14 U1.R15 U1.R16 U1.R17 U1.R20 U1.T3 U1.T4 U1.T10 U1.T11 U1.T14 U1.T15 U1.T16 U1.T17 U1.T18 U1.U7 U1.U8 U1.U9 U1.U10 U1.U11 U1.U12 U1.U13 U1.U14 U1.U15 U1.U16 U1.U17 U1.V3 U1.V4 U1.V5 U1.V6 U1.V7 U1.V8 U1.V9 U1.V10 U1.V11 U1.V12 U1.V13 U1.V14 U1.V15 U1.V16 U1.W6 U1.W7 U1.W8 U1.W17 U1.W19 U1.W20 U1.Y6 U1.Y7 U1.Y8 U1.Y17 UG2.4 UG2.9 UG2.10 UG2.11 UG2.12 UG2.14 UG2.15 UG2.16 UL1.1 UL1.5 UL1.6 UL1.8 UL1.9 UL1.13 UL1.14
copper on no net: | length 2.1
  Bottom Layer w0.2: v4(154,131) 154.52,131.52 155.9,131.52
  other v6: 220.275,79.545 217.225,133.925
  other v10: 213.02,45.73 213.02,66.03

## Polygon pours and split planes (outlines as drawn)
"+1.2 V" on Mid-Layer 4 "+1.2 V" (hatched 90Degree grid 0.18 track 0.2, remove dead copper, pour order 7): 154,111 166,111 166,97 154,97
GND on Internal Plane 1 (split plane): 225.49,26.51 26.51,26.51 26.51,155.49 225.49,155.49

## Keep-outs
Keep-Out Layer:
  the board outline again, w1

## Other copper
Top Layer:
  text "COMET" at 30.375,142.15 h2
  text "ECAL pretrigger v1.2" at 30.375,138.65 h2
  text "BINP, Epshteyn" at 30.375,135.15 h2
  text "November 2015" at 30.375,131.65 h2

## Silkscreen, mask and mechanical layers (free items; w line width, h text height)
Top Solder:
  the board outline again, w1
Bottom Solder:
  circle w2.5: c216.5,29.75 r1.25
  circle w2.5: c216.5,152.25 r1.25
  circle w2.5: c196.18,152.25 r1.25
  circle w2.5: c196.18,29.75 r1.25
  circle w2.5: c175.86,29.75 r1.25
  circle w2.5: c175.86,152.25 r1.25
  circle w2.5: c155.54,152.25 r1.25
  circle w2.5: c155.54,29.75 r1.25
  circle w2.5: c33.62,29.75 r1.25
  circle w2.5: c53.94,29.75 r1.25
  circle w2.5: c74.26,29.75 r1.25
  circle w2.5: c94.58,29.75 r1.25
  circle w2.5: c114.9,29.75 r1.25
  circle w2.5: c114.9,152.25 r1.25
  circle w2.5: c94.58,152.25 r1.25
  circle w2.5: c74.26,152.25 r1.25
  circle w2.5: c53.94,152.25 r1.25
  circle w2.5: c33.62,152.25 r1.25
  circle w2.5: c135.22,152.25 r1.25
  circle w2.5: c135.22,29.75 r1.25
  lines w1: 26,26 26,156 226,156 226,26 26,26
Mechanical 1:
  lines w0.254: 25,91 123.8,91 222.6,91

## Text inside footprints (layer, text, board x,y; h text height)
C1_In_ch1: Mechanical 3 "CHIP0603" at 35.941,60.018 h0.51 r90
C1_In_Ch2: Mechanical 3 "CHIP0603" at 56.261,60.018 h0.51 r90
C1_In_Ch3: Mechanical 3 "CHIP0603" at 76.581,60.018 h0.51 r90
C1_In_Ch4: Mechanical 3 "CHIP0603" at 96.901,60.018 h0.51 r90
C1_In_Ch5: Mechanical 3 "CHIP0603" at 117.221,60.018 h0.51 r90
C2_In_ch1: Mechanical 3 "CEL-SMD300" at 34.417,51.382 h0.51 r90
C2_In_Ch2: Mechanical 3 "CEL-SMD300" at 54.737,51.382 h0.51 r90
C2_In_Ch3: Mechanical 3 "CEL-SMD300" at 75.057,51.382 h0.51 r90
C2_In_Ch4: Mechanical 3 "CEL-SMD300" at 95.377,51.382 h0.51 r90
C2_In_Ch5: Mechanical 3 "CEL-SMD300" at 115.532,51.332 h0.51 r90
C3_In_ch1: Mechanical 3 "CHIP0603" at 40.005,62.431 h0.51
C3_In_Ch2: Mechanical 3 "CHIP0603" at 60.325,62.431 h0.51
C3_In_Ch3: Mechanical 3 "CHIP0603" at 80.645,62.431 h0.51
C3_In_Ch4: Mechanical 3 "CHIP0603" at 100.965,62.431 h0.51
C3_In_Ch5: Mechanical 3 "CHIP0603" at 121.285,62.431 h0.51
C4: Mechanical 3 "CHIP0603" at 172.032,90.484 h0.51
C5: Mechanical 3 "CHIP0603" at 158.984,93.968 h0.51 r270
C6: Mechanical 3 "CHIP0603" at 147.968,117.516 h0.51 r180
C7: Mechanical 3 "CHIP0603" at 147.968,92.516 h0.51 r180
C8: Mechanical 3 "CHIP0603" at 172.032,115.484 h0.51
C9: Mechanical 3 "CHIP0603" at 161.016,114.032 h0.51 r90
C10: Mechanical 3 "CHIP0603" at 149.968,105.016 h0.51 r180
C11: Mechanical 3 "CHIP0603" at 170.032,102.984 h0.51
C12: Mechanical 3 "CHIP0603" at 151.468,117.516 h0.51 r180
C13: Mechanical 3 "CHIP0603" at 151.468,92.516 h0.51 r180
C14: Mechanical 3 "CHIP0603" at 168.532,115.484 h0.51
C15: Mechanical 3 "CHIP0603" at 168.532,90.484 h0.51
C16: Mechanical 3 "CHIP0603" at 149.516,125.932 h0.51 r90
C17: Mechanical 3 "CHIP0603" at 157,144.516 h0.51 r180
C18: Mechanical 3 "CHIP0603" at 158.484,133.3 h0.51 r270
C19: Mechanical 3 "CHIP0603" at 153.968,105.016 h0.51 r180
C20: Mechanical 3 "CHIP0603" at 160.968,105.016 h0.51 r180
C21: Mechanical 3 "CHIP0603" at 159.032,102.984 h0.51
C22: Mechanical 3 "CHIP0603" at 158.984,97.968 h0.51 r270
C23: Mechanical 3 "CHIP0603" at 161.016,110.032 h0.51 r90
C24: Mechanical 3 "CHIP0603" at 166.032,102.984 h0.51
C25: Mechanical 3 "CHIP0603" at 161.016,103.032 h0.51 r90
C26: Mechanical 3 "CHIP0603" at 158.984,104.968 h0.51 r270
Cgen1: Mechanical 3 "CHIP0603" at 165.468,138.816 h0.51 r180
CL1: Mechanical 3 "CHIP0603" at 179.5,137.214 h0.51
CLED: Mechanical 3 "CHIP0805" at 106.77,139.04 h0.51 r90
CLED1: Mechanical 3 "CHIP0805" at 109.23,134.5 h0.51 r270
CLED2: Mechanical 3 "CHIP0805" at 114.23,134.5 h0.51 r270
CLED3: Mechanical 3 "CHIP0805" at 119.23,134.5 h0.51 r270
Csup1: Mechanical 3 "CEL-SMD300" at 192.668,59.732 h0.51 r180
Csup2: Mechanical 3 "CEL-SMD300" at 192.668,68.732 h0.51 r180
Csup3: Mechanical 3 "CEL-SMD300" at 192.668,49.232 h0.51 r180
Csup4: Mechanical 3 "CHIP0603" at 195.5,62.016 h0.51 r180
Csup5: Mechanical 3 "CHIP0603" at 195.5,71.016 h0.51 r180
Csup6: Mechanical 3 "CHIP0603" at 195.5,51.516 h0.51 r180
Csup7: Mechanical 3 "CHIP0603" at 146.784,48.5 h0.51 r270
Csup8: Mechanical 3 "CHIP0603" at 160.294,65.734 h0.51 r270
Csup9: Mechanical 3 "CHIP0603" at 146.484,66 h0.51 r270
Csup10: Mechanical 3 "CHIP0603" at 160.484,48.5 h0.51 r270
Csup11: Mechanical 3 "CHIP0603" at 130.216,132.4 h0.51 r90
Csup12: Mechanical 3 "CEL-SMD300" at 140.468,143.246 h0.51 r180
Csup13: Mechanical 3 "CEL-SMD300" at 148.968,54.968 h0.51 r270
Csup14: Mechanical 3 "CEL-SMD300" at 134.968,72.468 h0.51 r270
Csup15: Mechanical 3 "CEL-SMD300" at 134.368,54.868 h0.51 r270
Csup16: Mechanical 3 "CEL-SMD300" at 148.864,72.846 h0.51 r270
Csup17: Mechanical 3 "CHIP0603" at 132.116,134.8 h0.51 r90
Csup18: Mechanical 3 "CHIP0603" at 157.5,47.016 h0.51 r180
Csup19: Mechanical 3 "CHIP0603" at 143.5,64.516 h0.51 r180
Csup20: Mechanical 3 "CHIP0603" at 143.5,47.016 h0.51 r180
Csup21: Mechanical 3 "CHIP0603" at 157.373,64.337 h0.51 r180
ExtReset: Mechanical 3 "CHIP0603" at 167.5,90.516 h0.51 r180
InChCon1_In_ch1: Mechanical 3 "FX2CA2-52S-1.27DSL(71)" at 29.12,78.59 h1.52 r90
InChCon1_In_Ch2: Mechanical 3 "FX2CA2-52S-1.27DSL(71)" at 49.44,78.59 h1.52 r90
InChCon1_In_Ch3: Mechanical 3 "FX2CA2-52S-1.27DSL(71)" at 69.76,78.59 h1.52 r90
InChCon1_In_Ch4: Mechanical 3 "FX2CA2-52S-1.27DSL(71)" at 90.08,78.59 h1.52 r90
InChCon1_In_Ch5: Mechanical 3 "FX2CA2-52S-1.27DSL(71)" at 110.4,78.59 h1.52 r90
R3: Mechanical 3 "CHIP0603" at 144.468,110.016 h0.51 r180
R4: Mechanical 3 "CHIP0603" at 168,134.016 h0.51 r180
R5: Mechanical 3 "CHIP0603" at 144.468,111.516 h0.51 r180
R6: Mechanical 3 "CHIP0603" at 144.468,108.516 h0.51 r180
R7: Mechanical 3 "CHIP0603" at 144.468,107.016 h0.51 r180
R8: Mechanical 3 "CHIP0603" at 144.468,102.516 h0.51 r180
R8_In_ch1: Mechanical 3 "CHIP0603" at 36.83,64.463 h0.51
R8_In_Ch2: Mechanical 3 "CHIP0603" at 57.15,64.463 h0.51
R8_In_Ch3: Mechanical 3 "CHIP0603" at 77.47,64.463 h0.51
R8_In_Ch4: Mechanical 3 "CHIP0603" at 97.79,64.463 h0.51
R8_In_Ch5: Mechanical 3 "CHIP0603" at 118,64.484 h0.51
R9: Mechanical 3 "CHIP0603" at 146.5,98.984 h0.51
R9_In_ch1: Mechanical 3 "CHIP0603" at 35.941,63.447 h0.51 r90
R9_In_Ch2: Mechanical 3 "CHIP0603" at 56.261,63.447 h0.51 r90
R9_In_Ch3: Mechanical 3 "CHIP0603" at 76.581,63.447 h0.51 r90
R9_In_Ch4: Mechanical 3 "CHIP0603" at 96.901,63.447 h0.51 r90
R9_In_Ch5: Mechanical 3 "CHIP0603" at 117.221,63.447 h0.51 r90
RL1: Mechanical 3 "CHIP0603" at 189.3,134.116 h0.51 r180
RL2: Mechanical 3 "CHIP0603" at 189.3,135.416 h0.51 r180
RL3: Mechanical 3 "CHIP0603" at 189.3,136.716 h0.51 r180
RL4: Mechanical 3 "CHIP0603" at 189.3,138.016 h0.51 r180
RLED3: Mechanical 3 "CHIP0805" at 116.73,134.5 h0.51 r270
UL1: Mechanical 2 "14SO200" at 179.516,140.262 h0.51
Usup1: Mechanical 2 "TO-252" at 136.54,137 h0.76 r270
Usup2: Mechanical 2 "TO-252" at 155.214,51.04 h0.76
Usup3: Mechanical 2 "TO-252" at 141.214,68.54 h0.76
Usup4: Mechanical 2 "TO-252" at 141.214,51.04 h0.76
Usup5: Mechanical 2 "TO-252" at 155.214,68.54 h0.76
Usup_ch1_In_ch1: Mechanical 2 "TO-252" at 41.656,56.208 h0.76 r180
Usup_ch1_In_Ch2: Mechanical 2 "TO-252" at 61.976,56.208 h0.76 r180
Usup_ch1_In_Ch3: Mechanical 2 "TO-252" at 82.296,56.208 h0.76 r180
Usup_ch1_In_Ch4: Mechanical 2 "TO-252" at 102.616,56.208 h0.76 r180
Usup_ch1_In_Ch5: Mechanical 2 "TO-252" at 122.786,56.16 h0.76 r180
VDLED1: Mechanical 3 "LED2P5_H" at 110.54,134.976 h0.76
VDLED2: Mechanical 3 "LED2P5_H" at 115.54,134.976 h0.76
VDLED3: Mechanical 3 "LED2P5_H" at 120.54,134.976 h0.76